# Altium PCB lab_1_arhipov_usb_i2c.PcbDoc
Units mm, origin at the board's own origin, x right, y up, seen from the top; angles counter-clockwise.
Board outline 52.15 x 20.85 mm, 4 copper layers (Top Layer, Signal Layer 1, Signal Layer 2, Bottom Layer), stack 1.522 mm thick; 28 components, 27 nets, 91 pads, 153 vias.
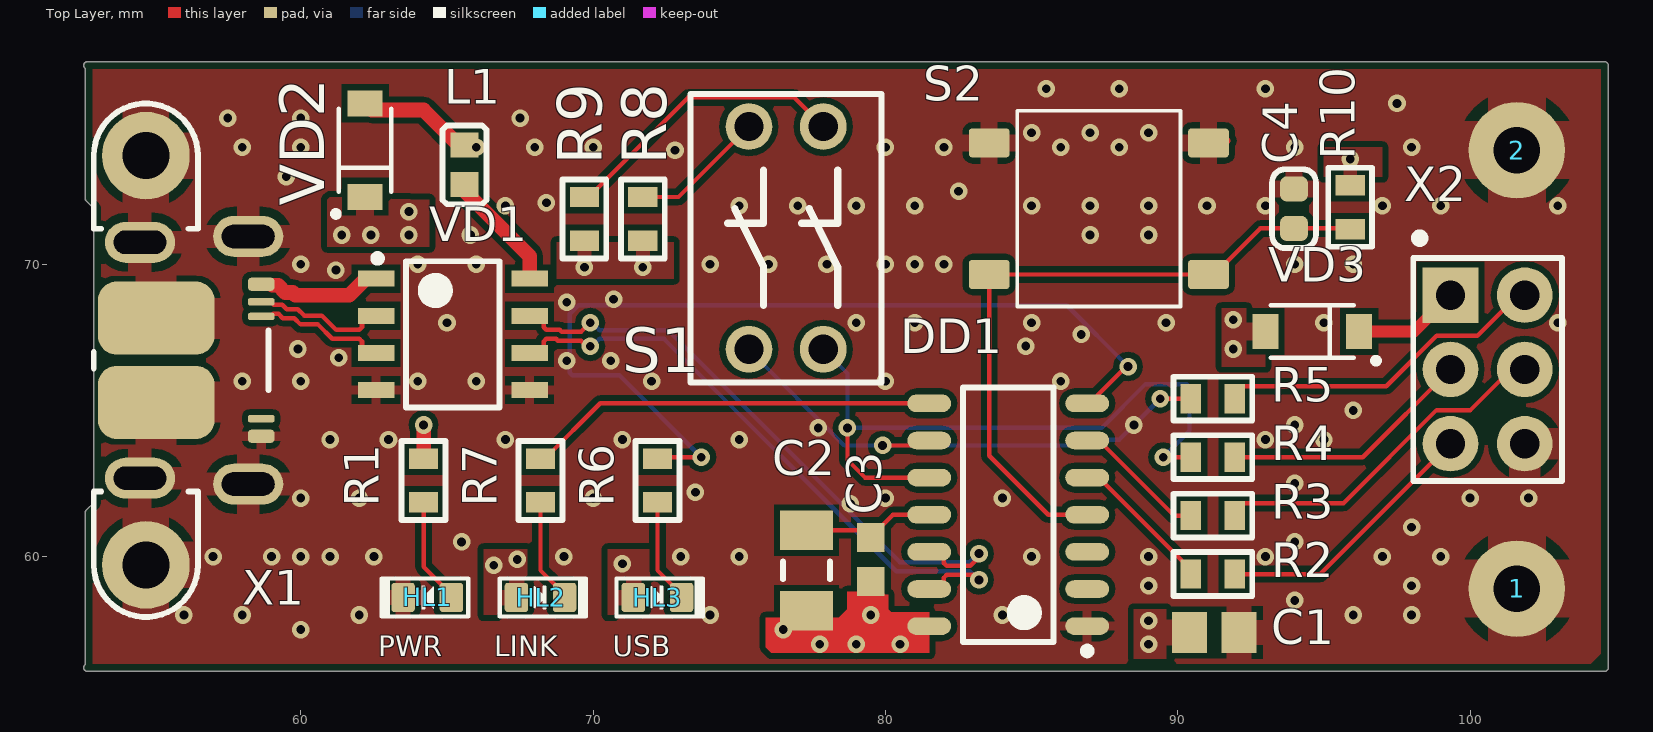
[diagram p0: Top Layer view]
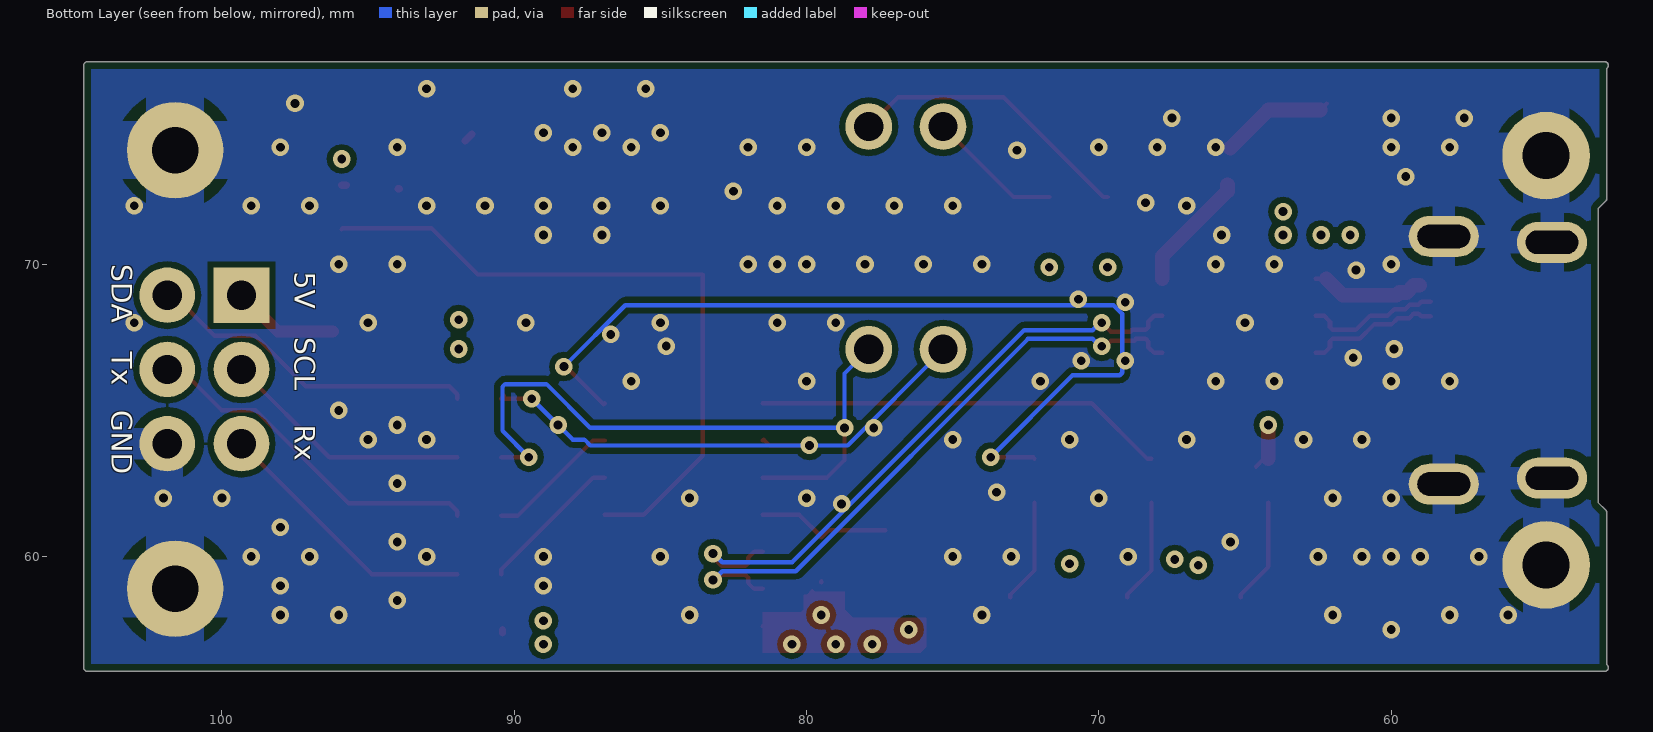
[diagram p1: Bottom Layer view, seen from below]
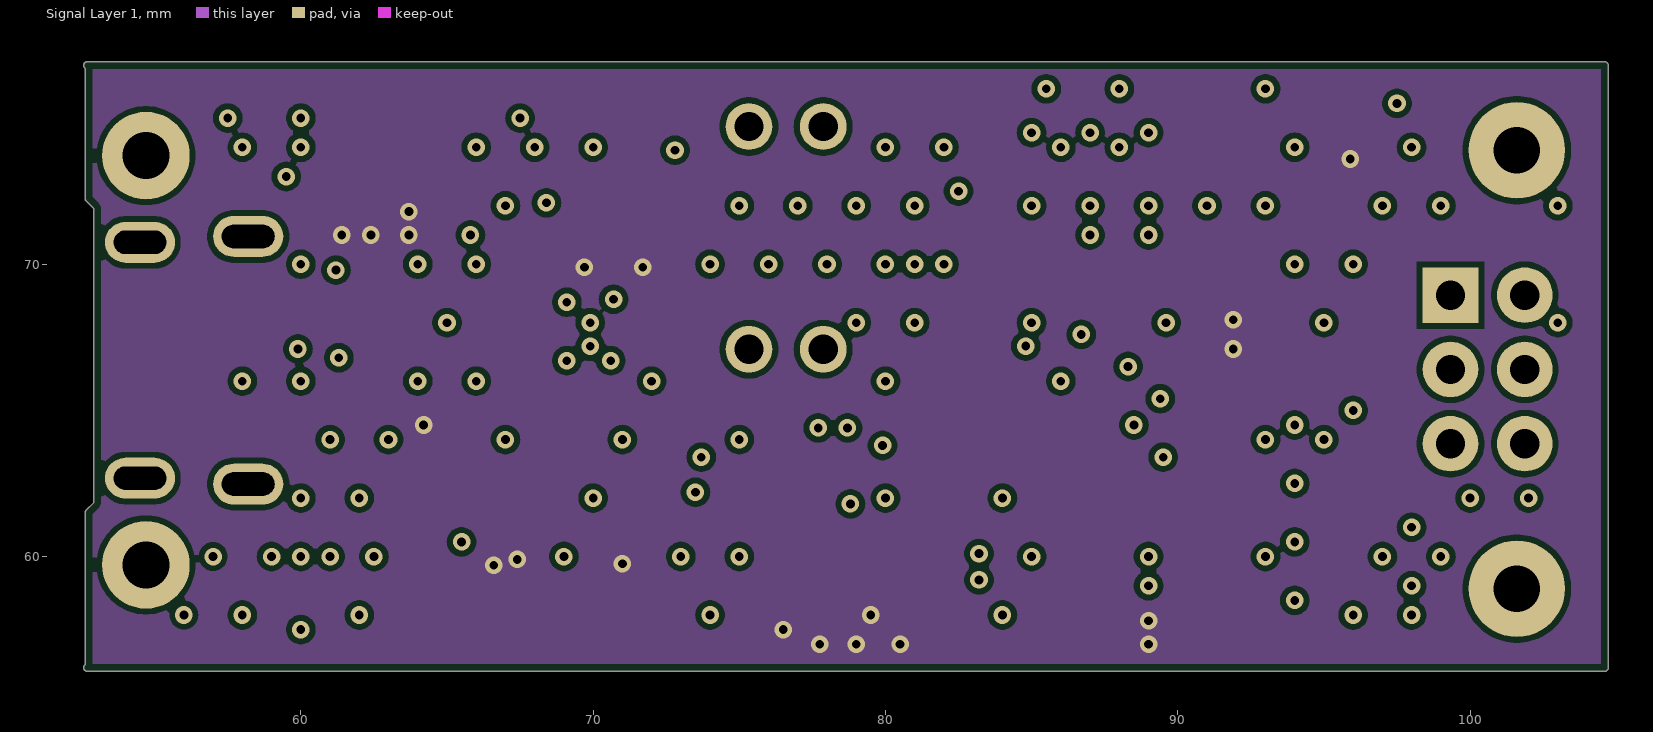
[diagram p2: Signal Layer 1]
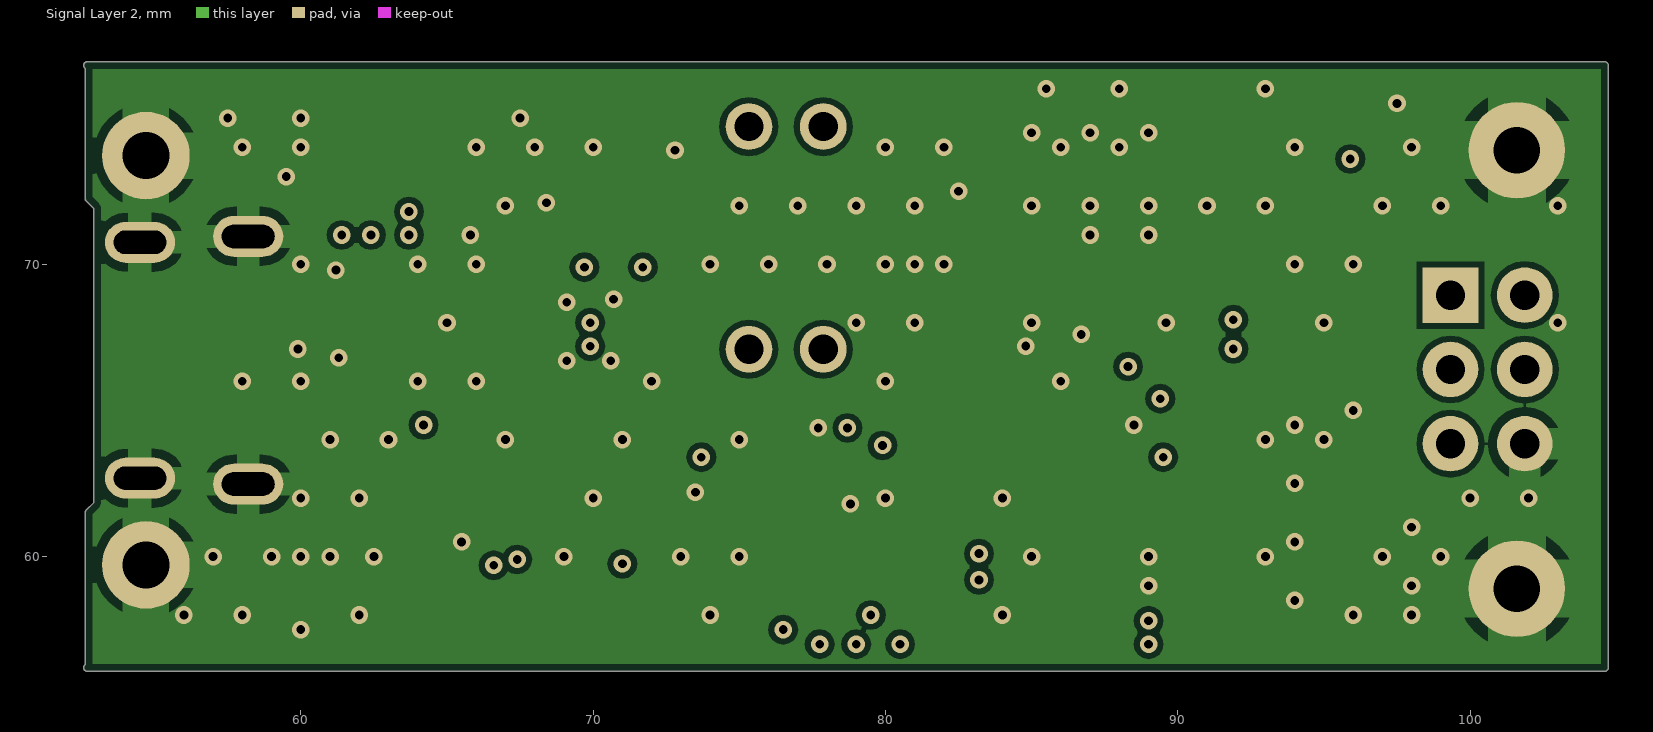
[diagram p3: Signal Layer 2]

## Layer stack, top to bottom
Top Solder: solder mask 0.0102, Solder Resist, Dk 3.5
Top Layer: signal copper 0.018
Prepreg 1: prepreg 0.125, FR4 HiTg170, Dk 5.07
Signal Layer 1: signal copper 0.018
Core 1: core 1.2, FR4, Dk 4.6
Signal Layer 2: signal copper 0.018
Prepreg 2: prepreg 0.125, FR4 HiTg170, Dk 5.07
Bottom Layer: signal copper 0.018
Bottom Solder: solder mask 0.0102, Solder Resist, Dk 3.5

## Board outline
52.623,56.301 52.623,61.5 cw(c52.75,61.5) 52.66,61.59 52.923,61.853 52.923,71.897 52.66,72.16 cw(c52.75,72.25) 52.623,72.25 52.623,76.699 cw(c52.7,76.8) 52.7,76.927 104.6,76.927 cw(c104.6,76.8) 104.727,76.8 104.727,56.2 cw(c104.6,56.2) 104.6,56.073 52.7,56.073 cw(c52.7,56.2)

## Design rules (kind name [scope] priority, off if disabled: settings)
AcuteAngle min_acute_angle [OnCopper] p1: minimum=3.50000000000000E+0001 checktracksonly=FALSE // Минимальный угол между примитивами топологии
BoardOutlineClearance board_outline_clearance_std [NOT (OnLayer('Bottom Overlay') OR OnLayer('Top Overlay'))] p1: gap=0.25 ignorepadtopadclearanceinfootprint=FALSE except(0: Arc-SplitContinuation Track-SplitContinuation SMDPad-SplitContinuation THPad-SplitContinuation Via-SplitContinuation Fill-SplitContinuation Poly-SplitContinuation Region-SplitContinuation Text-SplitContinuation) // Отступ элементов топологии от края фрезеруемой печатной платы
Clearance clearance_outer_18um_std [OnTopLayer OR OnBottomLayer] p1: gap=0.125 ignorepadtopadclearanceinfootprint=TRUE except(0.2: Arc-Fill Arc-Poly Track-Fill Track-Poly SMDPad-SMDPad SMDPad-Fill SMDPad-Poly THPad-Fill THPad-Poly Via-Fill Via-Poly Fill-Fill Fill-Poly Poly-Poly Poly-Region Poly-Text; 0.25: Arc-Hole Track-Hole SMDPad-Hole THPad-Hole Via-Hole Fill-Hole Poly-Hole Region-Hole Text-Hole) // Зазоры на внешних слоях
Clearance clearance_inner_18um_std [NOT (OnTopLayer Or OnBottomLayer)] p2: gap=0.125 ignorepadtopadclearanceinfootprint=FALSE except(0.2: Arc-Fill Arc-Poly Track-Fill Track-Poly SMDPad-SMDPad SMDPad-Fill SMDPad-Poly THPad-Fill THPad-Poly Via-Fill Via-Poly Fill-Fill Fill-Poly Poly-Poly Poly-Region Poly-Text; 0.25: Arc-Hole Track-Hole SMDPad-Hole THPad-Hole Via-Hole Fill-Hole Poly-Hole Region-Hole Text-Hole) // Зазоры на внутренних слоях
ComponentClearance [All] p1: gap=0 collisioncheckmode=3 verticalgap=0 showdistances=FALSE
DiffPairsRouting "Schematic Differential Pairs Routing_3" [InNet('CN_D_N')] p1: maxlimit=0.254 minlimit=0.15 mostfreqgap=0.254 toplayer_maxgap=0.15 toplayer_prefgap=0.15 toplayer_minwidth=0.155 toplayer_maxwidth=0.155 toplayer_prefwidth=0.155 bottomlayer_maxgap=0.15 bottomlayer_prefgap=0.15 bottomlayer_minwidth=0.155 bottomlayer_maxwidth=0.155 bottomlayer_prefwidth=0.155 impedanceprofiledriven=TRUE impedanceprofileid={1B1F1868-2FFB-4D51-908A-913D90CA9AFC} impedanceprofilevalue=95.000000 maxuncoupledlength=12.7
DiffPairsRouting "Schematic Differential Pairs Routing_2" [InNet('CN_D_P')] p2: maxlimit=0.254 minlimit=0.15 mostfreqgap=0.254 toplayer_maxgap=0.15 toplayer_prefgap=0.15 toplayer_minwidth=0.155 toplayer_maxwidth=0.155 toplayer_prefwidth=0.155 bottomlayer_maxgap=0.15 bottomlayer_prefgap=0.15 bottomlayer_minwidth=0.155 bottomlayer_maxwidth=0.155 bottomlayer_prefwidth=0.155 impedanceprofiledriven=TRUE impedanceprofileid={1B1F1868-2FFB-4D51-908A-913D90CA9AFC} impedanceprofilevalue=95.000000 maxuncoupledlength=12.7
DiffPairsRouting "Schematic Differential Pairs Routing_1" [InNet('USB_D_N')] p3: maxlimit=0.254 minlimit=0.15 mostfreqgap=0.254 toplayer_maxgap=0.15 toplayer_prefgap=0.15 toplayer_minwidth=0.155 toplayer_maxwidth=0.155 toplayer_prefwidth=0.155 bottomlayer_maxgap=0.15 bottomlayer_prefgap=0.15 bottomlayer_minwidth=0.155 bottomlayer_maxwidth=0.155 bottomlayer_prefwidth=0.155 impedanceprofiledriven=TRUE impedanceprofileid={1B1F1868-2FFB-4D51-908A-913D90CA9AFC} impedanceprofilevalue=95.000000 maxuncoupledlength=12.7
DiffPairsRouting "Schematic Differential Pairs Routing" [InNet('USB_D_P')] p4: maxlimit=0.254 minlimit=0.15 mostfreqgap=0.254 toplayer_maxgap=0.15 toplayer_prefgap=0.15 toplayer_minwidth=0.155 toplayer_maxwidth=0.155 toplayer_prefwidth=0.155 bottomlayer_maxgap=0.15 bottomlayer_prefgap=0.15 bottomlayer_minwidth=0.155 bottomlayer_maxwidth=0.155 bottomlayer_prefwidth=0.155 impedanceprofiledriven=TRUE impedanceprofileid={1B1F1868-2FFB-4D51-908A-913D90CA9AFC} impedanceprofilevalue=95.000000 maxuncoupledlength=12.7
DiffPairsRouting diff_pairs_routing [All] p5: maxlimit=0.254 minlimit=0.127 mostfreqgap=0.254 toplayer_maxgap=0.127 toplayer_prefgap=0.127 toplayer_minwidth=0.143 toplayer_maxwidth=0.143 toplayer_prefwidth=0.143 midlayer1_minwidth=0.381 midlayer1_maxwidth=0.381 midlayer1_prefwidth=0.381 midlayer2_minwidth=0.381 midlayer2_maxwidth=0.381 midlayer2_prefwidth=0.381 bottomlayer_maxgap=0.127 bottomlayer_prefgap=0.127 bottomlayer_minwidth=0.143 bottomlayer_maxwidth=0.143 bottomlayer_prefwidth=0.143 impedanceprofiledriven=TRUE impedanceprofileid={FD46899E-B5A2-4EF5-A302-5D2DB6A51F35} maxuncoupledlength=12.7 // Правила трассировки дифференциальных пар
HoleSize min_hole_size_std [IsPad] p1: absolutevalues=TRUE maxlimit=5.9 minlimit=0.6 maxpercent=80.000 minpercent=20.000 // Диаметр межслойного переходного отверстия
HoleSize min_hole_size_via_std [IsVia] p2: absolutevalues=TRUE maxlimit=5.9 minlimit=0.3 maxpercent=80.000 minpercent=20.000 // Минимальный диаметр монтажного отверстия
HoleToHoleClearance hole_to_hole_clearance_std [All] p1: gap=0.2 allowstackedmicrovias=FALSE // Минимальное расстояние между краями двух отверстий
MinimumAnnularRing min_via_ar_std [All] p1: minimumring=0.15 // Поясок площадки переходного отверстия (Annular ring VIA)
MinimumAnnularRing min_pad_ar_std [All] p2: minimumring=0.2 // Поясок монтажной контактной площадки (Annular ring PAD)
MinimumSolderMaskSliver min_solder_mask_bridge_std [All] p1: minsoldermaskwidth=0.15 // Мнимальная ширина масочного мостика
PlaneClearance plane_clearance_18um_std [All] p1: clearance=0.2 // Отступ полигона (для слоя plane) от элементов топологии
PlaneConnect [All] p1: planeconnectstyle=Relief reliefexpansion=0.5 reliefentries=4 reliefconductorwidth=0.2 reliefairgap=0.2
PolygonConnect poly_connect_to_pad<=0.3 [(AsMM(PadXSize_AllLayers)<=0.301) or (AsMM(PadYSize_AllLayers)<=0.301)] p1: thpad.connectstyle=Relief thpad.reliefconductorwidth=0.2 thpad.reliefentries=4 thpad.polygonreliefangle="90 Angle" thpad.airgapwidth=0.2 smdpad.connectstyle=Relief smdpad.reliefconductorwidth=0.2 smdpad.reliefentries=4 smdpad.polygonreliefangle="90 Angle" smdpad.airgapwidth=0.2 via.connectstyle=Direct via.reliefconductorwidth=0.254 via.reliefentries=4 via.polygonreliefangle="90 Angle" via.airgapwidth=0.254 // Правила подключения полигонов для падов от 0,3мм и меньше
PolygonConnect poly_connect_to_pad<=0.4 [(AsMM(PadXSize_AllLayers)<=0.401) or (AsMM(PadYSize_AllLayers)<=0.401)] p2: thpad.connectstyle=Relief thpad.reliefconductorwidth=0.26 thpad.reliefentries=4 thpad.polygonreliefangle="90 Angle" thpad.airgapwidth=0.2 smdpad.connectstyle=Relief smdpad.reliefconductorwidth=0.26 smdpad.reliefentries=4 smdpad.polygonreliefangle="90 Angle" smdpad.airgapwidth=0.2 via.connectstyle=Direct via.reliefconductorwidth=0.254 via.reliefentries=4 via.polygonreliefangle="90 Angle" via.airgapwidth=0.254 // Правила подключения полигонов для падов от 0,4 и меньше
PolygonConnect poly_connect_to_pad<=0.6 [(AsMM(PadXSize_AllLayers)<=0.601) or (AsMM(PadYSize_AllLayers)<=0.601)] p3: thpad.connectstyle=Relief thpad.reliefconductorwidth=0.33 thpad.reliefentries=4 thpad.polygonreliefangle="90 Angle" thpad.airgapwidth=0.2 smdpad.connectstyle=Relief smdpad.reliefconductorwidth=0.33 smdpad.reliefentries=4 smdpad.polygonreliefangle="90 Angle" smdpad.airgapwidth=0.2 via.connectstyle=Direct via.reliefconductorwidth=0.254 via.reliefentries=4 via.polygonreliefangle="90 Angle" via.airgapwidth=0.254 // Правила подключения полигонов для падов от 0,6мм и меньше
PolygonConnect poly_connect_to_pad<=0.7 [(AsMM(PadXSize_AllLayers)<=0.701) or (AsMM(PadYSize_AllLayers)<=0.701)] p4: thpad.connectstyle=Relief thpad.reliefconductorwidth=0.46 thpad.reliefentries=4 thpad.polygonreliefangle="90 Angle" thpad.airgapwidth=0.2 smdpad.connectstyle=Relief smdpad.reliefconductorwidth=0.46 smdpad.reliefentries=4 smdpad.polygonreliefangle="90 Angle" smdpad.airgapwidth=0.2 via.connectstyle=Direct via.reliefconductorwidth=0.254 via.reliefentries=4 via.polygonreliefangle="90 Angle" via.airgapwidth=0.254 // Правила подключения полигонов для падов от 0,7мм и меньше
PolygonConnect poly_connect_to_pad<=0.8 [(AsMM(PadXSize_AllLayers)<=0.8)or(AsMM(PadYSize_AllLayers)<=0.8)] p5: thpad.connectstyle=Relief thpad.reliefconductorwidth=0.53 thpad.reliefentries=4 thpad.polygonreliefangle="90 Angle" thpad.airgapwidth=0.3 smdpad.connectstyle=Relief smdpad.reliefconductorwidth=0.53 smdpad.reliefentries=4 smdpad.polygonreliefangle="90 Angle" smdpad.airgapwidth=0.2 via.connectstyle=Direct via.reliefconductorwidth=0.254 via.reliefentries=4 via.polygonreliefangle="90 Angle" via.airgapwidth=0.254 // Правила подключения полигонов для падов от 0,8мм и меньше
PolygonConnect poly_connect_to_pad<=1 [(AsMM(PadXSize_AllLayers)<=1.01)or(AsMM(PadYSize_AllLayers)<=1.01)] p6: thpad.connectstyle=Relief thpad.reliefconductorwidth=0.6 thpad.reliefentries=4 thpad.polygonreliefangle="90 Angle" thpad.airgapwidth=0.3 smdpad.connectstyle=Relief smdpad.reliefconductorwidth=0.6 smdpad.reliefentries=4 smdpad.polygonreliefangle="90 Angle" smdpad.airgapwidth=0.2 via.connectstyle=Direct via.reliefconductorwidth=0.254 via.reliefentries=4 via.polygonreliefangle="90 Angle" via.airgapwidth=0.254 // Правила подключения полигонов для падов от 1мм и меньше
PolygonConnect poly_connect_to_pad<=1.3 [(AsMM(PadXSize_AllLayers)<=1.31)or(AsMM(PadYSize_AllLayers)<=1.31)] p7: thpad.connectstyle=Relief thpad.reliefconductorwidth=0.66 thpad.reliefentries=4 thpad.polygonreliefangle="90 Angle" thpad.airgapwidth=0.3 smdpad.connectstyle=Relief smdpad.reliefconductorwidth=0.86 smdpad.reliefentries=4 smdpad.polygonreliefangle="90 Angle" smdpad.airgapwidth=0.2 via.connectstyle=Direct via.reliefconductorwidth=0.254 via.reliefentries=4 via.polygonreliefangle="90 Angle" via.airgapwidth=0.254 // Правила подключения полигонов для падов от 1,3мм и меньше
PolygonConnect poly_connect_to_pad<=1.6 [(AsMM(PadXSize_AllLayers)<=1.61)or(AsMM(PadYSize_AllLayers)<=1.61)] p8: thpad.connectstyle=Relief thpad.reliefconductorwidth=0.8 thpad.reliefentries=4 thpad.polygonreliefangle="90 Angle" thpad.airgapwidth=0.3 smdpad.connectstyle=Relief smdpad.reliefconductorwidth=1 smdpad.reliefentries=4 smdpad.polygonreliefangle="90 Angle" smdpad.airgapwidth=0.2 via.connectstyle=Direct via.reliefconductorwidth=0.254 via.reliefentries=4 via.polygonreliefangle="90 Angle" via.airgapwidth=0.254 // Правила подключения полигонов для падов от 1,6мм и меньше
PolygonConnect poly_connect_to_pad<=1.8 [(AsMM(PadXSize_AllLayers)<=1.8)or(AsMM(PadYSize_AllLayers)<=1.8)] p9: thpad.connectstyle=Relief thpad.reliefconductorwidth=1 thpad.reliefentries=4 thpad.polygonreliefangle="90 Angle" thpad.airgapwidth=0.3 smdpad.connectstyle=Relief smdpad.reliefconductorwidth=1.2 smdpad.reliefentries=4 smdpad.polygonreliefangle="90 Angle" smdpad.airgapwidth=0.2 via.connectstyle=Direct via.reliefconductorwidth=0.254 via.reliefentries=4 via.polygonreliefangle="90 Angle" via.airgapwidth=0.254 // Правила подключения полигонов для падов от 1,8мм и меньше
PolygonConnect poly_connect_to_pad<=2 [(AsMM(PadXSize_AllLayers)<=2.01)or(AsMM(PadYSize_AllLayers)<=2.01)] p10: thpad.connectstyle=Relief thpad.reliefconductorwidth=1.1 thpad.reliefentries=4 thpad.polygonreliefangle="90 Angle" thpad.airgapwidth=0.3 smdpad.connectstyle=Relief smdpad.reliefconductorwidth=1.4 smdpad.reliefentries=4 smdpad.polygonreliefangle="90 Angle" smdpad.airgapwidth=0.2 via.connectstyle=Direct via.reliefconductorwidth=0.254 via.reliefentries=4 via.polygonreliefangle="90 Angle" via.airgapwidth=0.254 // Правила подключения полигонов для падов от 2мм и меньше
PolygonConnect poly_connect_to_pad<=2.3 [(AsMM(PadXSize_AllLayers)<=2.31)or(AsMM(PadYSize_AllLayers)<=2.31)] p11: thpad.connectstyle=Relief thpad.reliefconductorwidth=1.2 thpad.reliefentries=4 thpad.polygonreliefangle="90 Angle" thpad.airgapwidth=0.3 smdpad.connectstyle=Relief smdpad.reliefconductorwidth=1.4 smdpad.reliefentries=4 smdpad.polygonreliefangle="90 Angle" smdpad.airgapwidth=0.2 via.connectstyle=Direct via.reliefconductorwidth=0.254 via.reliefentries=4 via.polygonreliefangle="90 Angle" via.airgapwidth=0.254 // Правила подключения полигонов для падов от 2,3мм и меньше
PolygonConnect poly_connect_to_pad<=2.5 [(AsMM(PadXSize_AllLayers)<=2.51)or(AsMM(PadYSize_AllLayers)<=2.51)] p12: thpad.connectstyle=Relief thpad.reliefconductorwidth=1.2 thpad.reliefentries=4 thpad.polygonreliefangle="90 Angle" thpad.airgapwidth=0.3 smdpad.connectstyle=Relief smdpad.reliefconductorwidth=1.4 smdpad.reliefentries=4 smdpad.polygonreliefangle="90 Angle" smdpad.airgapwidth=0.2 via.connectstyle=Direct via.reliefconductorwidth=0.254 via.reliefentries=4 via.polygonreliefangle="90 Angle" via.airgapwidth=0.254 // Правила подключения полигонов для падов от 2,5мм и меньше
PolygonConnect poly_connect_to_pad<=2.7 [(AsMM(PadXSize_AllLayers)<=2.71)or(AsMM(PadYSize_AllLayers)<=2.71)] p13: thpad.connectstyle=Relief thpad.reliefconductorwidth=1.4 thpad.reliefentries=4 thpad.polygonreliefangle="90 Angle" thpad.airgapwidth=0.3 smdpad.connectstyle=Relief smdpad.reliefconductorwidth=1.6 smdpad.reliefentries=4 smdpad.polygonreliefangle="90 Angle" smdpad.airgapwidth=0.2 via.connectstyle=Direct via.reliefconductorwidth=0.254 via.reliefentries=4 via.polygonreliefangle="90 Angle" via.airgapwidth=0.254 // Правила подключения полигонов для падов от 2,7мм и меньше
PolygonConnect poly_connect_to_pad<=3 [(AsMM(PadXSize_AllLayers)<=3.01)or(AsMM(PadYSize_AllLayers)<=3.01)] p14: thpad.connectstyle=Relief thpad.reliefconductorwidth=1.6 thpad.reliefentries=4 thpad.polygonreliefangle="90 Angle" thpad.airgapwidth=0.3 smdpad.connectstyle=Relief smdpad.reliefconductorwidth=1.8 smdpad.reliefentries=4 smdpad.polygonreliefangle="90 Angle" smdpad.airgapwidth=0.2 via.connectstyle=Direct via.reliefconductorwidth=0.254 via.reliefentries=4 via.polygonreliefangle="90 Angle" via.airgapwidth=0.254 // Правила подключения полигонов для падов от 3мм и меньше
PolygonConnect poly_connect_to_pad<=7 [(AsMM(PadXSize_AllLayers)<7.01)or(AsMM(PadYSize_AllLayers)<=7.01)] p15: thpad.connectstyle=Relief thpad.reliefconductorwidth=2 thpad.reliefentries=4 thpad.polygonreliefangle="90 Angle" thpad.airgapwidth=0.4 smdpad.connectstyle=Relief smdpad.reliefconductorwidth=2 smdpad.reliefentries=4 smdpad.polygonreliefangle="90 Angle" smdpad.airgapwidth=0.3 via.connectstyle=Direct via.reliefconductorwidth=0.254 via.reliefentries=4 via.polygonreliefangle="90 Angle" via.airgapwidth=0.254 // Правила подключения полигонов для падов от 7мм и меньше
PolygonConnect poly_connect_to_pad [All] p16: thpad.connectstyle=Relief thpad.reliefconductorwidth=0.25 thpad.reliefentries=4 thpad.polygonreliefangle="90 Angle" thpad.airgapwidth=0.2 smdpad.connectstyle=Relief smdpad.reliefconductorwidth=0.25 smdpad.reliefentries=4 smdpad.polygonreliefangle="90 Angle" smdpad.airgapwidth=0.2 via.connectstyle=Direct via.reliefconductorwidth=0.25 via.reliefentries=4 via.polygonreliefangle="90 Angle" via.airgapwidth=0.2 // Правила подключения полигонов общие
RoutingCorners [All] p1 off: cornerstyle=45-Degree minsetback=2.5 maxsetback=2.5
RoutingVias [All] p1: holewidth=0.3 width=0.6 viastyle="Through Hole" minholewidth=0.3 minwidth=0.6 maxholewidth=5.9 maxwidth=6.4
SilkToSilkClearance silk_to_silk_clearance_std [All] p1 off: silktosilkclearance=0.15 // Отступ текста шелкографии от других примитивов шелкографии
SilkToSolderMaskClearance silk_to_solder_mask_clearance_std [IsPad] p1 off: minsilkscreentomaskgap=0.15 clearancetoexposedcopper=FALSE // Минимальное расстояние между элементами шелкографии и вскрытой медью
SolderMaskExpansion solder_mask_expansion_std [All] p1: expansion=0.05 // Припуск паяльной масски
UnRoutedNet [All] p1: checkbadconnections=TRUE
Width width_18um_std [All] p1: maxlimit=10 minlimit=0.125 preferedwidth=0.15 checkconnectedcopper=TRUE // Ширина проводников (общая)
19 further rules are at their usual default settings.

## Classes and differential pairs
differential pair class USB_SIGNALS: CN_D USB_D
component class +5V: X2
differential pair USB_D: +USB_D_P -USB_D_N
differential pair CN_D: +CN_D_P -CN_D_N

## Components (designator, comment, footprint, x,y, rotation, side; value= is the part's Value field where it differs from the comment)
1 "MOUNTING_HOLE" HOLE_1,6X3,3 101.6,58.9 r90 top
2 "MOUNTING_HOLE" HOLE_1,6X3,3 101.6,73.9 r90 top
C1 "4.7 мк 10В" C0805 91.25,57.4 r180 top
C2 "2.2 мк 25В" C1206 77.3,59.525 r270 top
C3 "0.22 мк 25В" smd2220 79.5,59.9 r270 top
C4 "0,1 мк" C0603 93.975,71.9 r270 top
DD1 "MCP2221-I/SL" SOIC127P600X175-14N 81.5,65.24 r180 top
HL1 "KP-1608SGC" D0603 64.325,58.6 r180 top
HL2 "KP-1608SGC" D0603 68.2,58.6 r0 top
HL3 "KP-1608SGC" D0603 72.2,58.6 r0 top
L1 "BLM18PG221SN1D" L0603 65.6,73.4 r90 top
R1 "220" R0603 64.2,62.6 r90 top
R2 "33" R0603 91.2,59.4 r180 top
R3 "33" R0603 91.2,61.4 r180 top
R4 "33" R0603 91.2,63.4 r180 top
R5 "33" R0603 91.2,65.4 r180 top
R6 "330" R0603 72.2,62.6 r270 top
R7 "330" R0603 68.2,62.6 r270 top
R8 "10 к" R0603 71.7,71.55 r270 top
R9 "10 к" R0603 69.7,71.55 r270 top
R10 "10 к" R0603 95.9,71.95 r90 top
S1 "DS1040-02RN" DS1040-02RN 76.6,70.9 r0 top
S2 "KLS7-TS6604-5.0-180-B" KLS7-TS6604_500 87.3,71.9 r180 top
VD1 "USB6B1" SO-8 65.2,67.6 r0 top
VD2 "MBR140SFT1G" SOD-123FL_290X180X98 62.2,73.9 r270 top
VD3 "MBR140SFT1G" SOD-123FL_290X180X98 94.6,67.7 r0 top
X1 "2108877-1" 2108877-1 54.95,66.715 r90 top
X2 "DS1021-2*3SF11" PLS-2,54-2X3-THT-V 100.6,66.4 r270 top

## Footprints (in the part's own frame and the unit in brackets; to place one, negate y for a bottom-side part, rotate by r counter-clockwise, add the part's x,y. Pads: shape width x height; smd on the part's side, far side on the other; paste and mask are expansions set on the pad)
2108877-1 [mm] "Micro USB-B, Flanged"
  rrect50% 0.45x0.9 smd: 1(2.6,-3.696) 5(-2.6,-3.696)
  rrect50% 0.25x0.9 smd: 2(2,-3.696) 3(1.5,-3.696) 4(-2,-3.696)
  round 3 hole 1.6: TP1(-7,0.25) TP1(7,0.25)
  oval 1.4x2.4 hole 0.8 slot 1.8 at 90 deg mask+0.102: TP1(-4.235,-3.25) TP1(-4.035,0.45) TP1(4.035,0.45) TP1(4.235,-3.25)
  rrect50% 2.5x3.98 smd: TP1(-1.441,-0.104) TP1(1.441,-0.104)
  silkscreen extent -8.78,-3.95 8.78,2.03, body extent -8.9,-3.95 8.9,3.95, height 3.39
C0603 [mm] "Chip Capacitor, 2-Leads, Body 1,60x0,80mm, IPC Medium Density"
  rrect50% 0.85x0.95 smd: 1(-0.675,0) 2(0.675,0)
  Top Layer pour cut-out: -0.254,0.5 -0.254,-0.5 0.254,-0.5 0.254,0.5
  silkscreen extent -1.35,-0.75 1.35,0.75, body extent -0.85,-0.45 0.85,0.45, height 0.9
C0805 [mm]
  rect 1.2x1.4 smd: 1(-0.85,0) 2(0.85,0)
  body extent -1.05,-0.67 1.05,0.67, height 1.25
C1206 [mm]
  rect 1.35x1.8 smd: 1(-1.375,0) 2(1.375,0)
  silkscreen extent -0.3,-0.8 0.3,0.8, body extent -1.7,-0.9 1.7,0.9, height 1.6
D0603 [mm]
  rrect25% 0.8x1 smd paste-10 mask+0.1: 1(-0.825,0) 2(0.825,0)
  silkscreen extent -1.4,-0.65 1.55,0.65, body extent -0.81,-0.4 0.81,0.4, height 0.6
DS1040-02RN [mm]
  round 1.6 hole 1: 1(-1.27,3.81) 2(-1.27,-3.81) 3(1.27,3.81) 4(1.27,-3.81)
  silkscreen extent -3.27,-4.95 3.27,4.92, body extent -3.27,-4.95 3.27,4.95, height 6.8
HOLE_1,6X3,3 [mm]
  round 3.3 hole 1.6: 1(0,0)
KLS7-TS6604_500 [mm] "6.5x6.5mm SMD tact switch 5mm stem"
  rrect25% 1.4x1 smd: 1(-3.75,2.25) 1(3.75,2.25) 2(-3.75,-2.25) 2(3.75,-2.25)
  silkscreen extent -2.79,-3.35 2.79,3.35, body extent -4,-3.25 4,3.25, height 4.3
L0603 [mm]
  rect 0.85x0.95 smd: 1(-0.675,0) 2(0.675,0)
  silkscreen extent -1.35,-0.75 1.35,0.75, body extent -0.85,-0.45 0.85,0.45, height 0.9
PLS-2,54-2X3-THT-V [mm] "PLS-2x3"
  rect 1.9x1.9 hole 1: 1(-2.54,-1.27)
  round 1.9 hole 1: 2(-2.54,1.27) 3(0,-1.27)
  round 1.9 hole 1 mask+0.102: 4(0,1.27) 5(2.54,-1.27) 6(2.54,1.27)
  silkscreen extent -4.5,-2.55 3.81,2.54, body extent -3.81,-2.54 3.81,2.54, height 8.59
R0603 [mm]
  rect 0.7x1 smd: 1(-0.75,0) 2(0.75,0)
  silkscreen extent -1.35,-0.75 1.35,0.75, body extent -0.8,-0.43 0.8,0.42, height 0.45
smd2220 [mm] "Chip Diode, 2-Leads, Body 1,60x0,80mm, IPC Medium Density"
  rect 1x0.95 smd: 1(-0.75,0) 2(0.75,0)
  body extent -0.85,-0.45 0.85,0.45, height 0.8
SO-8 [mm]
  rect 1.25x0.55 smd: 1(-2.625,1.905) 2(-2.625,0.635) 3(-2.625,-0.635) 4(-2.625,-1.905) 5(2.625,-1.905) 6(2.625,-0.635) 7(2.625,0.635) 8(2.625,1.905)
  silkscreen extent -2.7,-2.5 1.6,2.72, body extent -3.1,-2.5 3.1,2.5, height 1.75
SOD-123FL_290X180X98 [mm]
  rect 0.9x1.2 smd: 1(-1.6,0) 2(1.6,0)
  silkscreen extent -1.43,-1.1 2.28,0.9, body extent -1.83,-0.83 1.87,0.77, height 1.12
SOIC127P600X175-14N [mm] "SOIC, 14-Leads, Body 8,65x3,90mm, Pitch 1,27mm, IPC Medium Density"
  oval 1.5x0.6 smd: 1(-5.4,7.62) 2(-5.4,6.35) 3(-5.4,5.08) 4(-5.4,3.81) 5(-5.4,2.54) 6(-5.4,1.27) 7(-5.4,0) 8(0,0) 9(0,1.27) 10(0,2.54) 11(0,3.81) 12(0,5.08) 13(0,6.35) 14(0,7.62)
  silkscreen extent -5.53,-0.54 -1.15,8.59, body extent -4.65,-0.54 -0.75,8.16, height 1.75

## Part data
C1: library part c0004, "=Описание", HelpURL=https://static6.arrow.com/aropdfconversion/24268746ef1013a85114e321d5aafbc0d1e19c82/cl21f475zpfnnn_specsheet.pdf, ID=c0004, Корпус=0805, Наименование=CL21F475ZPFNNNE, Номинал="4.7 мк 10В", Номинальное напряжение=10В, Описание="Конденсатор чип 0805 4.7 мкФ 10 В", Отклонение="±10 %", Производитель="Samsung electro-mechanics", Рабочие температуры="от -55 °С до +125 °С", Фамилия=Архипов
C2: library part c0003, "=Описание", HelpURL=https://www.datasheets360.com/pdf/7863126215795052319, ID=c0003, Корпус=1206, Наименование=CL31B225KAHNNNE, Номинал="2.2 мк 25В", Номинальное напряжение=25В, Описание="Конденсатор чип 1206 2.2 мкФ 25 В", Отклонение="±10 %", Производитель="Samsung electro-mechanics", Рабочие температуры="от -55 °С до +125 °С", Фамилия=Архипов
C3: library part c0002, "=Описание", HelpURL=http://www.farnell.com/datasheets/2710631.pdf, ID=c0002, Корпус=0603, Наименование=CL10B224KA8NNNC, Номинал="0.22 мк 25В", Номинальное напряжение="25 В", Описание="Конденсатор чип 0603 0.22 мкФ 25 В", Отклонение="±10 %", Производитель="Samsung electro-mechanics", Рабочие температуры="от -55 °С до +125 °С", Фамилия=Архипов
C4: "Конденсатор", HelpURL=http://weblib.samsungsem.com/mlcc/mlcc-ec-data-sheet.do?partNumber=CL10B104KB8NNN, ID=c0007, Корпус=0603, Наименование=CL10B104KB8NNN, Напряжение="50 В", Номинал="0,1 мк", Описание="Конденсатор керамический 0603 0,1 мкФ 50 В ±10 % X7R", Отклонение="±10 %", Примечание="В наименовании убрана последняя буква, обозначающая упаковку", Производитель=Samsung, ТКЕ=X7R, Фамилия=Черемный
DD1: library part mcp2221
R1 R2 R3 R4 R5 R6 R7 R8 R9 R10: "Резистор 0,063Вт", HelpURL=https://www.yageo.com/upload/media/product/products/datasheet/rchip/PYu-RC_Group_51_RoHS_L_10.pdf, Корпус=0603, Напряжение="75 В", Отклонение="±1 %", Производитель=YAGEO, Температура окружающей среды (корпуса), макс#="+155 °C", Температура окружающей среды (корпуса), мин#="-55 °C", Фамилия=Капустин
  R1: ID=r0232, Наименование=RC0603FR-07220RL, Номинал=220, Описание="Резистор чип 0603 220 Ом 0,1 Вт ±1 %", Температурный коэффициент сопротивления="200 ppm"
  R2 R3 R4 R5: ID=r0214, Наименование=RC0603FR-0733RL, Номинал=33, Описание="Резистор чип 0603 33 Ом 0,1 Вт ±1 %", Температурный коэффициент сопротивления="200 ppm"
  R6 R7: ID=r0034, Наименование=RC0603FR-07330RL, Номинал=330, Описание="Резистор чип 0603 300 Ом 0,1 Вт ±1 %", Температурный коэффициент сопротивления="100 ppm"
  R8 R9 R10: ID=r0006, Наименование=RC0603FR-0710KL, Номинал="10 к", Описание="Резистор чип 0603 10 кОм 0,1 Вт ±1 %", Температурный коэффициент сопротивления="200 ppm"
X1: library part 2108877-1_micro_usb-b, Contact_1=VBUS, Contact_2=D-, Contact_3=D+, Contact_4=ID, Contact_5=GND, Наименование=2108877-1
1 2: ID=fstn0011, Диаметр отверстия="1,6 мм", Наименование="Отверстие 1,6x3,3", Описание="Отверстие под М1,5", Параметры металлизации="3,3 мм"
HL1 HL2 HL3: HelpURL=http://www.farnell.com/datasheets/2045827.pdf?_ga=2.72147859.1066726363.1573580702-223521920.1573064505, ID=led0004, Корпус=D0603, Максимальное обратное напряжение="5 В", Максимальное прямое напряжение="2,5 В", Максимальный импульсный прямой ток="140 мА", Максимальный обратный ток="11 мкА", Наименование=KP-1608SGC, Описание="Светодиод зеленый SMD 0603", Примечание="Не найти документацию на свйте производителя", Производитель=Kingbright, Прямой ток="20 мА", Температура окружающей среды (корпуса), макс#="+85 °C", Температура окружающей среды (корпуса), мин#="-40 °C", Фамилия=Капустин, Цвет=Зеленый
L1: HelpURL=https://www.murata.com/en-eu/products/productdetail?partno=BLM18PG221SN1%23, ID=ind0014, Добротность="не указана", Индуктивность="220 Ом @ 100 МГц", Корпус=0603, Максимальный ток="1,4 А", Наименование=BLM18PG221SN1D, Номинал="220 Ом", Описание="Ферритовая бусина 220 Ом @ 100МГц", Отклонение=±25%, Производитель=Murata, Сопротивление обмотки="0,1 Ом", Температура окружающей среды (корпуса), макс#="+125 °C", Температура окружающей среды (корпуса), мин#="-55 °C", Фамилия=Капустин
S1: HelpURL=http://www.connfly.com/userfiles/image/UpLoadFile/File/2017/1/20/DS1040-N.pdf, ID=sw0002, Капустин=Капустин, Количество контактов=2, Корпус=6,54х9,9х5,5, Наименование=DS1040-02RN, Описание="2-х позиционный движковый переключатель", Производитель="Connfly Electronic Co. LTD", Промывка=Запрещена, Сопротивление контакта="100 мОм", Температура окружающей среды (корпуса), макс#="+105 °C", Температура окружающей среды (корпуса), мин#="-40 °C", Ток нагрузки="100 мА @ 24 В"
S2: HelpURL=http://www.klsele.com/admin/product_upload/20120515130956KLS7-TS6604.pdf, ID=sw0003, Капустин=Черемный, Количество контактов=4, Корпус=6х6х3,5, Наименование=KLS7-TS6604-5.0-180-B, Описание="Тактовая кнопка поверхностного монтажа", Производитель=KLS, Промывка="Не указано (запрещена)", Сопротивление контакта="50 мОм", Температура окружающей среды (корпуса), макс#="+70 °C", Температура окружающей среды (корпуса), мин#="-20 °C", Ток нагрузки="50 мА @ 12 В"
VD1: HelpURL=https://www.st.com/resource/en/datasheet/usb6b1.pdf, ID=asmvd0007, Корпус=SO-8, Наименование=USB6B1, Описание="Диодная сборка для защиты USB", Производитель="ST Microelectronics", Температура окружающей среды (корпуса), макс#="+85 °C", Температура окружающей среды (корпуса), мин#="-40 °C", Фамилия=Капустин
VD2 VD3: HelpURL=https://www.onsemi.com/pub/Collateral/MBR140SFT1-D.PDF, ID=vd0004, Корпус=SOD-123, Максимальное обратное напряжение="40 В", Максимальное прямое напряжение="0,88 В", Максимальный импульсный прямой ток="30 А", Максимальный обратный ток="10 мА @ Ta = 125°C", Максимальный прямой ток="1 А", Наименование=MBR140SFT1G, Описание="Диод Шоттки 40 В 1 А", Производитель="ON Semiconductor", Температура окружающей среды (корпуса), макс#="+125 °C", Температура окружающей среды (корпуса), мин#="-55 °C", Фамилия=Капустин
X2: ClassName=+5V, Contact_01=+5V, Contact_02=SDA, Contact_03=SCL, Contact_04=UTx, Contact_05=URx, Contact_06=GND, HelpURL=http://www.connfly.com/userfiles/image/UpLoadFile/File/2015/1/29/DS1021.pdf, ID=cn0076, Альтернатива="не указана", Количество контактов=6, Контакт=отсутствует, Наименование=DS1021-2*3SF11, Напряжение="250 В", Описание="PLS 6-ти контактный прямой двухрядный (2,54 мм)", Ответная часть=DS1023-2*3S22, Производитель="Connfly Electronic Co. LTD", Семейство=PLS, Температура окружающей среды (корпуса), макс#="+105 °C", Температура окружающей среды (корпуса), мин#="-40 °C", Тип вывода=Прямой, Ток на контакт="3 А", Фамилия=Капустин, Цвет=Черный, Шаг="2,54 мм"

## Via types
v1: diameter 0.6, hole 0.3, Top Layer to Bottom Layer, tented both sides, 153 vias

## Nets (pads, with @x,y where several pads share a name; then routed paths per layer and width w, separated by ;. In a path a pad name is that pad's centre, name@x,y a point inside that pad or via, vN(x,y) a via of type N, cw(c..) or ccw(c..) an arc to the next point about the centre after c; other vN are vias at no path point)
+5V: C1.2 C2.2 C3.2 DD1.14 HL2.1 HL3.1 R1.2 R8.2 R9.2 R10.2 VD2.2 VD3.1 | length 2.5
  Top Layer w0.15: R1.2 64.35,63.35 R1.2@64.625,63.075 ; C3.2@79.5,59.125 C3.2 ; DD1.14@81.005,57.62 DD1.14 DD1.14@81.48,57.6
  Top Layer w0.254: C1.2 C1.2@90.4,57.5 ; R10.2@95.75,72.7 R10.2
  Top Layer w0.5: R1.2 v1(64.2,64.5)
  other v1: 77.75,57 79,57 80.5,57 89,57 76.5,57.5 89,57.8 79.5,58 66.6,59.7 71,59.75 67.4,59.9 91.9,67.1 91.9,68.1 69.7,69.9 71.7,69.9 61.4,71 62.4,71 63.7,71 63.7,71.8 95.9,73.6
CN_5V_IN: VD1.1 X1.1 | length 4
  Top Layer w0.15: X1.1@59.029,69.221 X1.1@59.029,69.279 ; 59.718,69.032 59.809,68.941 ; VD1.1@62.225,69.505 VD1.1
  Top Layer w0.5: X1.1@59.029,69.279 59.221,69.279 59.468,69.032 59.718,69.032 ; 59.809,68.941 61.661,68.941 VD1.1@62.225,69.505
CN_D_N: VD1.2 X1.2 | length 4.6
  Top Layer w0.155: X1.2 58.971,68.715 59.075,68.611 59.364,68.611 59.514,68.461 59.901,68.461 60.118,68.244 60.713,68.244 61.204,67.753 62.002,67.753 62.093,67.843 62.093,68.038 62.291,68.235 VD1.2
CN_D_P: VD1.3 X1.3 | length 4.6
  Top Layer w0.155: X1.3 58.971,68.215 59.062,68.306 59.238,68.306 59.388,68.156 59.774,68.156 59.991,67.939 60.586,67.939 61.078,67.447 62.002,67.447 62.093,67.357 62.093,67.162 62.291,66.965 VD1.3
CN_SCL: R4.1 X2.3 | length 8.6
  Top Layer w0.15: R4.1 96.33,63.4 X2.3
CN_SDA: R5.1 X2.2 | length 11.5
  Top Layer w0.15: R5.1 91.95,65.55 92.225,65.825 97.129,65.825 98.854,67.55 100.25,67.55 101.64,68.94 X2.2
CN_URx: R2.1 X2.5 | length 9.2
  Top Layer w0.15: R2.1 94.87,59.4 X2.5
CN_UTx: R3.1 X2.4 | length 12.1
  Top Layer w0.15: R3.1 91.95,61.55 92.225,61.825 95.669,61.825 98.854,65.01 100.01,65.01 101.4,66.4 X2.4
GND: 1.1 2.1 C1.1 C4.1 DD1.1 HL1.2 S2.2 VD1.4 VD1.5 X1.5 X1.TP1 X2.6 | length 0.4
  Top Layer w0.254: S2.2@91.45,74.45 S2.2@91.677,74.223 ; C4.1@93.925,72.575 C4.1
  other v1: 60,57.5 56,58 58,58 62,58 74,58 84,58 96,58 98,58 94,58.5 89,59 98,59 57,60 59,60 60,60 61,60 62.5,60 69,60 73,60 75,60 85,60 89,60 93,60 97,60 99,60 65.5,60.5 94,60.5 98,61 78.8,61.8 60,62 62,62 70,62 80,62 84,62 100,62 102,62 73.5,62.2 94,62.5 61,64 63,64 67,64 71,64 75,64 93,64 95,64 77.7,64.4 88.5,64.5 94,64.5 96,65 58,66 60,66 64,66 66,66 72,66 80,66 86,66 69.1,66.7 70.6,66.7 61.3,66.8 59.9,67.1 84.8,67.2 86.7,67.6 65,68 79,68 81,68 85,68 89.6,68 95,68 103,68 69.1,68.7 70.7,68.8 61.2,69.8 60,70 64,70 66,70 74,70 76,70 78,70 80,70 81,70 82,70 94,70 96,70 65.8,71 87,71 89,71 67,72 75,72 77,72 79,72 81,72 85,72 87,72 89,72 91,72 93,72 97,72 99,72 103,72 68.4,72.1 82.5,72.5 59.5,73 72.8,73.9 58,74 60,74 66,74 68,74 70,74 80,74 82,74 86,74 88,74 94,74 98,74 85,74.5 87,74.5 89,74.5 57.5,75 60,75 67.5,75 97.5,75.5 85.5,76 88,76 93,76
I2C_LINK: DD1.8 R7.1 | length 14.1
  Top Layer w0.15: R7.1 68.35,63.35 70.24,65.24 DD1.8
NetC2_1: C2.1 C3.1 DD1.11 | length 4.6
  Top Layer w0.15: C2.1 79.25,60.9 C3.1 79.5,60.675 80.255,61.43 DD1.11
NetHL1_1: HL1.1 R1.1 | length 3.6
  Top Layer w0.15: R1.1 64.2,59.65 65.15,58.7 HL1.1
NetHL2_2: HL2.2 R7.2 | length 3.6
  Top Layer w0.15: R7.2 68.2,59.525 69.025,58.7 HL2.2
NetHL3_2: HL3.2 R6.2 | length 3.6
  Top Layer w0.15: R6.2 72.2,59.525 73.025,58.7 HL3.2
NetL1_1: L1.1 VD1.8 | length 4.1
  Top Layer w0.5: L1.1 65.6,72.5 67.825,70.275 VD1.8
NetL1_2: L1.2 VD2.1 | length 3.9
  Top Layer w0.15: VD2.1 VD2.1@62.425,75.275
  Top Layer w0.5: VD2.1@62.425,75.275 64.2,75.275 L1.2@65.5,73.975
NetR8_1: R8.1 S1.1 | length 4.6
  Top Layer w0.15: R8.1 72.92,72.3 S1.1
NetR9_1: R9.1 S1.3 | length 10
  Top Layer w0.15: R9.1 69.85,72.3 73.26,75.71 76.87,75.71 S1.3
NetVD3_2: VD3.2 X2.1 | length 3.6
  Top Layer w0.4: VD3.2 98.09,67.7 X2.1
nRST: C4.2 DD1.4 R10.1 S2.1 | length 23.4
  Top Layer w0.15: DD1.4 85.57,61.43 83.55,63.45 83.55,69.65 91.05,69.65 91.25,69.65 92.825,71.225 C4.2 95.875,71.225 R10.1
SCL: DD1.10 R4.2 S1.4 | length 23.3
  Top Layer w0.15: v1(78.7,64.4) 78.7,63.3 79.3,62.7 DD1.10 ; v1(89.5,63.4) R4.2
  Bottom Layer w0.15: S1.4 78.7,66.26 v1(78.7,64.4) 87.4,64.4 88.9,65.9 90.312,65.9 90.4,65.812 90.4,64.3 v1(89.5,63.4)
SDA: DD1.9 R5.2 S1.2 | length 19
  Top Layer w0.15: v1(79.9,63.8) 81.27,63.8 81.47,64 DD1.9 ; v1(89.4,65.4) R5.2 R5.2@90.35,65.5
  Bottom Layer w0.15: S1.2 75.33,67.063 78.593,63.8 v1(79.9,63.8) 87.4,63.8 87.6,64 88,64 v1(89.4,65.4)
URx: DD1.5 R2.2 | length 5
  Top Layer w0.15: DD1.5 87.3,62.7 90.45,59.55 R2.2
USB_CFG: DD1.7 R6.1 | length 31.3
  Top Layer w0.15: R6.1 72.25,63.4 v1(73.7,63.4) ; DD1.7 86.94,65.2 88.24,66.5 v1(88.3,66.5)
  Bottom Layer w0.15: v1(73.7,63.4) 70.9,66.2 69.288,66.2 69.2,66.288 69.2,68.3 69.5,68.6 86.2,68.6 v1(88.3,66.5)
USB_D_N: DD1.12 VD1.7 | length 21.5
  Top Layer w0.155: VD1.7 68.109,68.235 68.307,68.038 68.307,67.843 68.398,67.753 68.86,67.753 68.92,67.693 69.587,67.693 69.784,67.89 v1@69.9,67.89 ; DD1.12 81.796,60.16 82.001,59.954 82.001,59.768 82.092,59.678 82.9,59.678 83.2,59.978 v1@83.2,59.9
  Bottom Layer w0.155: v1(69.9,68) 69.961,68 70.213,67.748 72.551,67.748 80.496,59.803 82.887,59.803 83.184,60.1 v1(83.2,60.1)
USB_D_P: DD1.13 VD1.6 | length 21.4
  Top Layer w0.155: VD1.6 68.109,66.965 68.307,67.162 68.307,67.357 68.398,67.447 68.733,67.447 68.793,67.388 69.587,67.388 69.784,67.19 v1(69.9,67.19) ; DD1.13 81.796,58.89 82.001,59.096 82.001,59.282 82.092,59.372 83.028,59.372 v1(83.2,59.2)
  Bottom Layer w0.155: v1(69.9,67.19) 69.961,67.19 70.213,67.442 72.425,67.442 80.37,59.497 82.887,59.497 83.184,59.2 v1(83.2,59.2)
UTx: DD1.6 R3.2 | length 4.6
  Top Layer w0.15: DD1.6 87.305,63.97 89.875,61.4 R3.2
pads on no net: DD1.2 DD1.3 X1.4

## Polygon pours and split planes (outlines as drawn)
GND on Top Layer "GND_01" (solid, pour order 112): 52.7,76.8 52.6,76.7 52.6,56.1 103.9,56.1 104.727,56.927 104.727,76.901
+5V on Top Layer "1" (solid, pour order 92): 67.75,58 66.25,58 66.25,60.25 67.75,60.25
+5V on Top Layer "5V_1" (solid, pour order 104): 60.9,72.3 60.9,70.6 64.4,70.6 64.4,72.2
+5V on Top Layer "NETL1_1_L01_P001" (solid, pour order 88): 72,58 70.5,58 70.5,60.25 72,60.25
no net on Top Layer "Top Layer-No Net" (solid, pour order 80): 67.25,59.75
+5V on Top Layer "NETL1_1_L01_P007" (solid, pour order 72): 68.75,70.75 72.75,70.75 72.75,69.5 68.75,69.5
+5V on Top Layer "Top Layer-+5V" (solid, pour order 70): 95,74 95,73 97,73 97,74
+5V on Top Layer "NETL1_1_L01_P006" (solid, pour order 68): 93,66.5 91.5,66.5 91.5,68.5 93,68.5
+5V on Top Layer "Top Layer-+5V 1" (solid, pour order 24): 88.5,58.2 88.5,56.5 90.4,56.5 90.4,58.2
GND on Signal Layer 2 "GND_L03_P022" (solid, pour order 98): 52.5,56 52.75,56.25 52.75,77.25 104,77.25 104.727,76.523 104.727,56
GND on Bottom Layer "GND_L03_P023" (solid, pour order 100): 52.75,77 52.75,56.25 53,56 104.727,56 104.727,77
+5V on Signal Layer 1 "+5V_L02_P102" (solid, remove dead copper, pour order 102): 52.6,76.9 52.6,56.1 104.727,56.1 104.727,76.9

## Other copper
Top Layer:
  region net +5V: 81.5,58.1 80.2,58.1 80.1,58.2 80.1,58.7 80,58.7 79.8,58.9 79.7,58.8 78.7,58.8 78.7,58.2 78.4,57.9 75.9,57.9 75.9,56.9 76.1,56.7 81.5,56.7

## Silkscreen, mask and mechanical layers (free items; w line width, h text height)
Top Overlay:
  text "PWR" at 62.65,56.35 h1.2
  text "LINK" at 66.625,56.35 h1.2
  text "USB" at 70.675,56.35 h1.2
Bottom Overlay:
  text "SDA" at 104,70 h1.2 r90
  text "5V" at 97.75,69.75 h1.2 r90
  text "SCL" at 97.75,67.5 h1.2 r90
  text "Tx" at 104,67 h1.2 r90
  text "GND" at 104,65 h1.2 r90
  text "Rx" at 97.75,64.5 h1.2 r90
Board:
  lines w0.254: 52.7,56.2 104.6,56.2 104.6,61.35 104.6,71.65 104.6,76.8 52.7,76.8 ; 52.75,56.25 52.75,61.5 53.05,61.8 53.05,62.05 53.05,71.95 52.75,72.25 52.75,76.75
Assembly Notes (Mech5):
  text "'.title'" at 52.75,53.75 h2
  text "'.project'_'.pcb_dec_number'['.Pcb_File_Name_No_Path']" at 52.75,51.25 h2